# EAGLE board 2.3 (EAGLE 8.2.2)
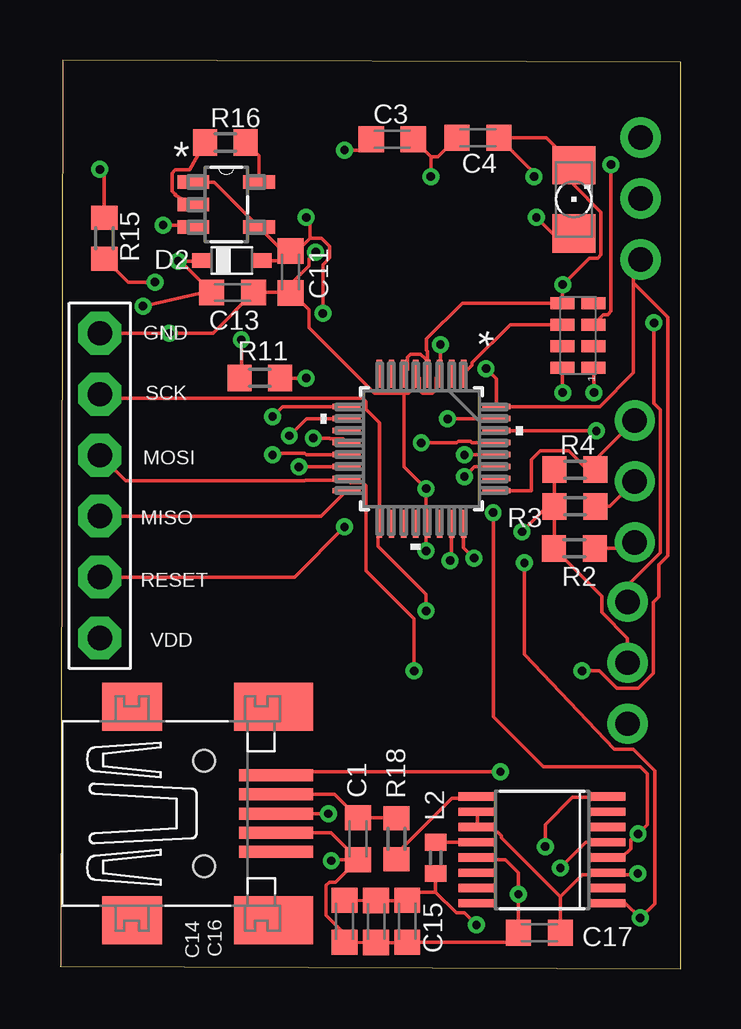
[diagram p0: board, top side]
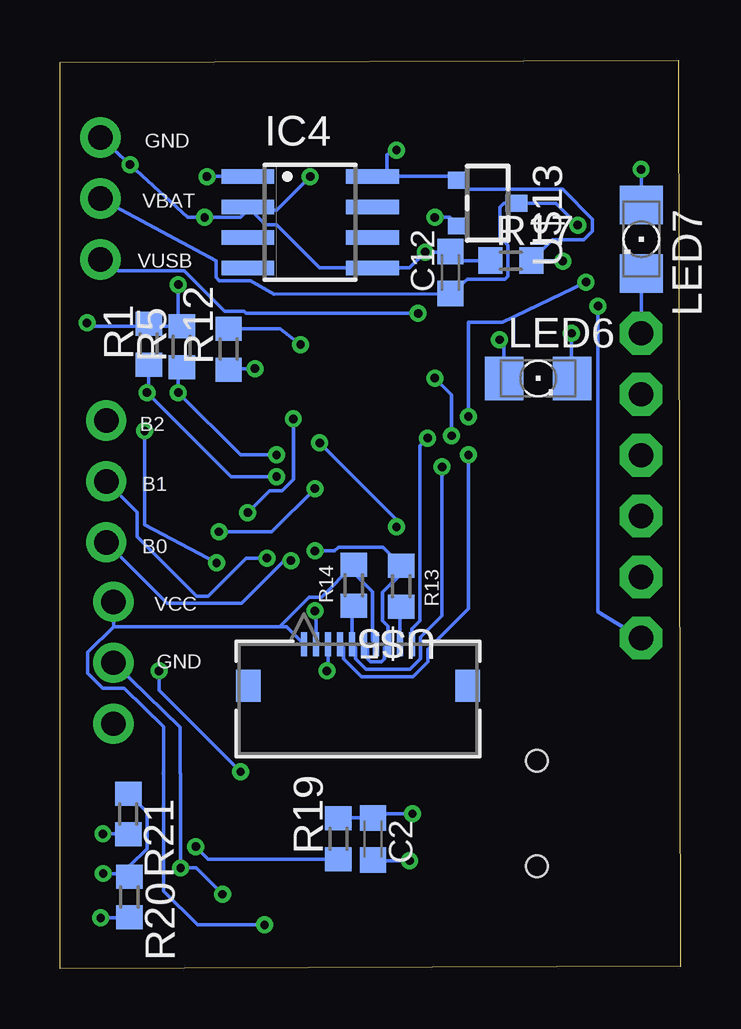
[diagram p1: board, bottom side, seen from below]

Size 25.89 x 37.86 mm. Coordinates in mm from the lower left corner, seen from the top.
Outline: 0,0.1 25.89,0 25.89,37.76 0.12,37.86 0.02,0.08
Copper layers (1*16): Top 0.0356mm / dielectric 1.5011mm / Bottom 0.0356mm
Design rules "oshpark-2layer": minimum track width 6mil, minimum drill 13mil, track to track 6mil, track to pad 6mil, pad to pad 6mil, via to via 6mil, smd to smd 6mil, copper to edge 15mil, drill to drill 6mil, minimum pad ring 7mil, minimum via ring 7mil, stop-mask expansion 2.5mil, vias tented up to drill 0mil, thermal gap 10mil

## Footprints (pad centres in the part's own frame; a part is rotated, then mirrored left to right if it is on the bottom)
C0603K = smd 1.05 x 1.08: 1 -0.875,0; 2 0.875,0
SOD323_ST = smd 0.8 x 0.6: A 1.25,0; C -1.25,0
SSOP16 = smd 0.35 x 1.55: 1 -2.223,-2.7; 2 -1.587,-2.7; 3 -0.953,-2.7; 4 -0.318,-2.7; 5 0.318,-2.7; 6 0.953,-2.7; 7 1.587,-2.7; 8 2.223,-2.7; 9 2.223,2.7; 10 1.587,2.7; 11 0.953,2.7; 12 0.318,2.7; 13 -0.318,2.7; 14 -0.953,2.7; 15 -1.587,2.7; 16 -2.223,2.7
SO08 = smd 0.6 x 2.2: 1 -1.905,-2.6; 2 -0.635,-2.6; 3 0.635,-2.6; 4 1.905,-2.6; 5 1.905,2.6; 6 0.635,2.6; 7 -0.635,2.6; 8 -1.905,2.6
1X03-CLEANBIG = drill 1.016 pad 1.676: 1 -2.54,0; 2 0,0; 3 2.54,0
1X06-BIG = drill 1.016 pad 1.778 octagon: 1 -6.35,0; 2 -3.81,0; 3 -1.27,0; 4 1.27,0; 5 3.81,0; 6 6.35,0
0402 = smd 0.7 x 0.9: 1 -0.65,0; 2 0.65,0
1206 = smd 1.6 x 1.803: A -1.422,0; C 1.422,0
R0603 = smd 1 x 1.1: 1 -0.85,0; 2 0.85,0
32A-L = smd 1.168 x 0.229: 1 -3.124,1.751; 2 -3.124,1.251; 3 -3.124,0.751; 4 -3.124,0.25; 5 -3.124,-0.25; 6 -3.124,-0.751; 7 -3.124,-1.251; 8 -3.124,-1.751; 17 3.124,-1.751; 18 3.124,-1.251; 19 3.124,-0.751; 20 3.124,-0.25; 21 3.124,0.25; 22 3.124,0.751; 23 3.124,1.251; 24 3.124,1.751 | smd 0.229 x 1.168: 9 -1.751,-3.124; 10 -1.251,-3.124; 11 -0.751,-3.124; 12 -0.25,-3.124; 13 0.25,-3.124; 14 0.751,-3.124; 15 1.251,-3.124; 16 1.751,-3.124; 25 1.751,3.124; 26 1.251,3.124; 27 0.751,3.124; 28 0.25,3.124; 29 -0.25,3.124; 30 -0.751,3.124; 31 -1.251,3.124; 32 -1.751,3.124
LCC-8 = smd 0.5 x 1: 1 0.25,0.1; 2 1.15,0.1; 3 2.05,0.1; 4 2.95,0.1; 5 2.95,1.4; 6 2.05,1.4; 7 1.15,1.4; 8 0.25,1.4
CON10_1X10_DBR_XF2L = smd 0.254 x 1.016: 1 2.25,2.286; 2 1.75,2.286; 3 1.25,2.286; 4 0.75,2.286; 5 0.25,2.286; 6 -0.25,2.286; 7 -0.75,2.286; 8 -1.25,2.286; 9 -1.75,2.286; 10 -2.25,2.286 | smd 1.016 x 1.346: 11 -4.572,4.013; 12 4.572,4.013
SOT95P270X145-5N = smd 1.321 x 0.559: 1 -1.372,0.94; 2 -1.372,0; 3 -1.372,-0.94; 4 1.372,-0.94; 5 1.372,0.94
SOT346-R = smd 0.7 x 0.9: 1 -0.95,-1.2; 2 0.95,-1.2; 3 0,1.2
32005-301 = smd 3.1 x 0.5: 1 3,1.6; 2 3,0.8; 3 3,0; 4 3,-0.8; 5 3,-1.6 | smd 2.5 x 2: M1 -3,-4.45; M2 -3,4.45 | smd 3.3 x 2: M3 2.9,4.45; M4 2.9,-4.45 | hole 0.9: 0,2.2; 0,-2.2

## Placement (x,y rotation side)
C1  47pF  [C0603K]  12.42,5.41 90 top
C2  47pF  [C0603K]  12.85,5.4 270 bottom
C3  1uF  [C0603K]  13.85,34.56 0 top
C4  2.2uF  [C0603K]  17.42,34.62 180 top
C11  1uF  [C0603K]  9.62,29.02 270 top
C12  1uF  [C0603K]  9.62,29 90 bottom
C13  1uF  [C0603K]  7.2,28.17 0 top
C14  10nF  [C0603K]  11.87,1.97 270 top
C15  4.7uF  [C0603K]  14.48,1.97 270 top
C16  100nF  [C0603K]  13.19,1.96 270 top
C17  100nF  [C0603K]  19.99,1.5 180 top
D2  BAT60J  [SOD323_ST]  7.16,29.5 0 top
IC2  FT230XS  [SSOP16]  20.1,4.95 90 top
IC4  L4931D  [SO08]  15.46,31.1 270 bottom
JP1  [1X03-CLEANBIG]  23.96,20.3 90 top
JP2  [1X06-BIG]  1.66,20.12 90 top
JP3  [1X03-CLEANBIG]  24.2,32.09 90 top
JP4  [1X03-CLEANBIG]  23.66,12.74 270 top
L2  [0402]  15.67,4.61 270 top
LED4  [1206]  21.42,32.05 90 top
LED6  [1206]  5.95,24.59 0 bottom
LED7  [1206]  1.65,30.39 270 bottom
R1  4.7K  [R0603]  22.19,26.01 90 bottom
R2  10K  [R0603]  21.44,17.51 0 top
R3  10K  [R0603]  21.47,19.26 0 top
R4  10K  [R0603]  21.47,20.79 0 top
R5  4.7K  [R0603]  20.81,25.91 90 bottom
R11  330  [R0603]  8.33,24.61 0 top
R12  10K  [R0603]  18.86,25.81 90 bottom
R13  100  [R0603]  11.66,15.93 90 bottom
R14  10K  [R0603]  13.64,15.97 270 bottom
R15  330  [R0603]  1.85,30.43 270 top
R16  2K  [R0603]  6.89,34.42 0 top
R17  10K  [R0603]  7.09,29.5 0 bottom
R18  27  [R0603]  14.03,5.41 90 top
R19  27  [R0603]  14.29,5.41 90 bottom
R20  10K  [R0603]  23,2.99 270 bottom
R21  10K  [R0603]  23.04,6.44 270 bottom
U1  ATMEGA328P-AUR32A-L  [32A-L]  15.07,21.66 270 top
U$1  M41T62LC6F  [LCC-8]  22.34,24.78 90 top
U$5  XF2L-1025-1ABOTTOM  [CON10_1X10_DBR_XF2L]  13.46,15.8 180 bottom
U$12  [SOT95P270X145-5N]  6.93,31.83 0 top
U$13  2JS305  [SOT346-R]  8.06,31.89 270 bottom
X2  MINI-USB-32005-301  [32005-301]  6.01,6.46 0 top

## Library data of the parts
C1-C4 C11-C17 = rcl
D2 = diode
IC2 = ft230x_10; MF: FTDI; MPN: FT230XS; OC_FARNELL: 2081321; OC_NEWARK: 83T7087
IC4 = v-reg-3
JP1 JP3 JP4 LED4 LED6 LED7 = adafruit
JP2 = adafruit; NAME_: value
L2 = inductors
R1-R5 R11-R17 R19-R21 = eagle-ltspice; SPICEMODEL: NONE; SPICEPREFIX: R
R18 = eagle-ltspice; SPICEMODEL: NONE; SPICEPREFIX: R6
U1 = MyParts; MANUFACTURER_PART_NUMBER: ATMEGA328PAUR; VENDOR: Atmel
U$1 U$5 = MyParts
U$12 = Microchip_By_element14_Batch_1; MPN: MCP73812T-420I/OT; OC_FARNELL: 1627187; OC_NEWARK: 27M0232; PACKAGE: SOT-5; SUPPLIER: Microchip
U$13 = SOT346-R
X2 = con-cypressindustries; OC_FARNELL: unknown; OC_NEWARK: unknown

## Nets
8: IC2.8 R19.1
9: IC2.9 R18.1
B0: JP1.1 R2.2 U1.23
B1: JP1.2 R3.2 U1.24
B2: JP1.3 R4.2 U1.25
GND: C1.1 C2.2 C3.2 C4.2 C11.2 C12.2 C13.2 C14.2 C15.2 C16.2 C17.2 IC2.5 IC2.13 IC4.2 IC4.5 JP2.6 JP3.3 JP4.2 LED4.A LED6.C LED7.C R2.1 R3.1 R4.1 R12.2 R13.2 R17.1 U1.3 U1.5 U1.21 U$1.3 U$5.6 U$5.8 X2.4
INT_RTC: U1.1 U$1.6
LCD_RESET: U1.13 U$5.4
LEDANODE: U1.12 U$5.10
MISO: JP2.3 U1.16
MOSI: JP2.4 U1.15 U$5.3
N$1: R13.1 U$5.9
N$2: IC2.12 L2.1
N$3: R15.2 U1.9
N$5: R16.2 U$12.5
N$6: R16.1 U$12.2
N$12: LED6.A R11.1
N$13: LED7.A R15.1
N$16: R11.2 U1.10
N$17: U1.18
N$26: U$5.12
N$27: U$5.11
NET1: C17.1 IC2.3 IC2.10 IC2.11 R20.1 R21.1
RESET: JP2.2 U1.29
RXD: IC2.1 R20.2 U1.30
SCK: JP2.5 U1.17 U$5.2
SCL: R5.1 U1.28 U$1.8
SDA: R1.1 U1.27 U$1.1
SHEILD: X2.5
SS: R14.2 U1.14 U$5.5
TXD: IC2.4 R21.2 U1.31
USB+: C2.1 R19.2 X2.3
USB-: C1.2 R18.2 X2.2
VBAT: C12.1 JP3.2 U$12.3 U$13.3
VCC: C4.1 C14.1 C15.1 C16.1 IC4.1 JP4.1 L2.2 LED4.C R1.2 R5.2 R14.1 U1.4 U1.6 U$1.5 U$5.1 U$5.7
VDD: C3.1 C13.1 D2.C IC4.8 JP2.1 R17.2 U$13.1
VUSB: C11.1 D2.A JP3.1 R12.1 U1.32 U$12.1 U$12.4 U$13.2 X2.1

## Tracks (layer width: path | path; a pad name or v marks a point on that pad's centre or on a via)
8  (via drill 0.35)
  Top 0.152: v20.23,5.08 20.23,6 21.37,7.14 22.77,7.14 IC2.8
  Bottom 0.152: R19.1 19.71,4.56 v20.23,5.08
9
  Top 0.152: R18.1 14.03,4.78 16.34,7.09 17.32,7.09 IC2.9
B0  (via drill 0.35)
  Top 0.152: R2.2 23.71,17.51 JP1.1 | v16.26,17 16.32,17.06 U1.23
  Bottom 0.152: JP1.1 21.42,15.21 18.33,15.21 16.54,17 v16.26,17
B1  (via drill 0.35)
  Top 0.152: R3.2 22.92,19.26 JP1.2 | v17.26,17.1 16.82,17.54 U1.24
  Bottom 0.152: JP1.2 22.67,19 22.67,17.98 20.2,15.52 19.72,15.52 18.14,17.1 v17.26,17.1
B2
  Top 0.152: JP1.3 22.32,21.2 R4.2 22,20.79 21.22,21.57 20.03,21.57 19.67,21.21 19.67,19.91 U1.25
GND  (via drill 0.35)
  Top 0.152: C13.2 9.47,28.17 C11.2 9.62,28.21 | C13.2 | v10.66,29.86 10.39,29.58 10.39,29.27 9.62,28.51 9.62,28.21 | C1.1 11.3,5.66 X2.4 | v11.31,4.49 11.31,4.54 C1.1 | C1.1 11.48,3.6 11.23,3.6 11.1,3.46 11.1,2.22 11.87,1.45 C14.2 C16.2 14.4,1.08 C15.2 14.42,1.09 18.72,1.1 C17.2 v19.12,3.1 19.12,3.99 18.56,4.54 17.49,4.54 IC2.13 | IC2.5 21.94,5.26 v20.86,4.19 | R4.1 R3.1 | R3.1 20.62,17.54 R2.1 22.6,15.51 22.6,14.84 23.66,13.77 JP4.2 | 15.46,33.83 C3.2 | 15.46,33.83 v15.46,33 | C4.2 15.75,33.83 15.46,33.83 | JP2.6 v4.56,26.47 6.38,26.47 C13.2 | R3.1 20.32,19.26 v19.26,18.2 | 15.26,18.6 v15.26,20 14.35,20.91 14.35,23.97 | 15.26,18.6 U1.21 | LED4.A 20.54,30.63 v19.86,31.3 | v15.26,17.4 15.26,18.6 | v15.86,26 15.86,24.82 U1.3 15.67,24.63 15.67,24.11 15.53,23.97 15.11,23.97 14.98,24.11 14.98,24.63 U1.5 14.79,24.75 14.79,24.22 14.53,23.97 14.35,23.97 | 14.35,23.97 13.11,23.97 10.38,26.7 10.38,27.44 9.62,28.21 | U$1.3 22.66,27.25 22.84,27.25 22.97,27.38 v22.97,33.5
  Bottom 0.152: R17.1 9.12,29.5 C12.2 9.64,29.86 v10.66,29.86 11.32,29.2 IC4.5 15.07,29.2 16.87,30.99 17.32,30.99 17.92,31.59 | C2.2 12.85,4.49 v11.31,4.49 | v19.12,3.1 20.21,4.19 v20.86,4.19 20.86,8.12 20.88,8.14 20.88,10.06 JP4.2 | 17.99,31.66 17.92,31.59 | 17.99,31.66 IC4.2 | v15.46,33 16.87,31.59 17.92,31.59 | U$5.6 13.07,13.37 13.07,12.91 12.94,12.78 12.49,12.78 12.36,12.91 12.36,13.37 U$5.8 12.21,14.26 12.44,14.48 12.44,15.67 11.66,16.45 R13.2 12.43,17.55 14.29,17.55 14.44,17.4 v15.26,17.4 | v19.26,18.2 17.06,18.2 v15.26,20 | 17.99,31.66 18.35,31.3 v19.86,31.3 20.58,31.3 v22.97,33.5 JP3.3 | v15.86,26 16.72,26.66 R12.2 | LED6.C 4.56,24.62 v4.56,26.47 | LED7.C JP2.6
INT_RTC
  Top 0.152: U1.1 17.18,25.14 17.18,25.24 18.77,26.83 U$1.6
LCD_RESET  (via drill 0.35)
  Top 0.152: U1.13 10.28,21.41 10.2,21.48 8.94,21.48 v8.86,21.4
  Bottom 0.152: U$5.4 14.07,13.37 14.07,12.91 13.33,12.17 11.17,12.17 10.55,12.79 10.55,13.31 8.86,15 v8.86,21.4
LEDANODE  (via drill 0.35)
  Top 0.152: v10.56,22.1 11.24,22.1 11.27,22.07 11.79,22.07 U1.12
  Bottom 0.152: U$5.10 11.21,14.16 10.88,14.48 10.88,21.78 v10.56,22.1
MISO
  Top 0.152: U1.16 10.89,18.85 JP2.3
MOSI  (via drill 0.35)
  Top 0.152: 12.01,20.35 12.11,20.25 12.63,20.25 12.76,20.12 12.76,16.58 14.76,14.58 v14.76,12.4 | 12.01,20.35 U1.15 | 12.01,20.35 10.24,20.35 10.2,20.32 2.73,20.32 JP2.4
  Bottom 0.152: U$5.3 14.71,12.45 v14.76,12.4
N$1
  Bottom 0.152: R13.1 11.71,15.03 U$5.9
N$2
  Top 0.152: L2.1 IC2.12
N$3  (via drill 0.35)
  Top 0.152: R15.2 2.83,28.6 v3.96,28.6 | v8.86,23 9.27,23.41 U1.9
  Bottom 0.152: v3.96,28.6 7.44,26.92 8.87,26.92 8.86,25.13 v8.86,23
N$5
  Top 0.152: R16.2 8.31,33.86 U$12.5
N$6
  Top 0.152: R16.1 5.4,33.28 4.81,33.28 4.67,33.14 4.67,32.4 4.81,32.26 4.82,32.26 4.8,32.23 U$12.2
N$12  (via drill 0.35)
  Top 0.152: R11.1 7.56,24.69 v7.56,26.2
  Bottom 0.152: v7.56,26.2 7.38,26.01 LED6.A
N$13  (via drill 0.35)
  Top 0.152: v1.66,33.3 1.85,33.11 R15.1
  Bottom 0.152: LED7.A 1.66,31.82 v1.66,33.3
N$16  (via drill 0.35)
  Top 0.152: R11.2 v10.26,24.6 | v9.56,22.2 10.27,22.91 U1.10
  Bottom 0.152: v10.26,24.6 9.56,23.9 v9.56,22.2
NET1  (via drill 0.35)
  Top 0.152: 20.87,2.99 C17.1 | 20.87,2.99 21.78,3.91 22.72,3.91 | 22.72,3.91 IC2.3 | IC2.10 IC2.11 18.04,5.9 18.4,5.53 18.4,5.46 20.87,2.99 | v24.09,3.96 24.04,3.91 22.72,3.91
  Bottom 0.152: v24.09,3.96 23.12,3.96 R20.1 23,4.26 22.27,4.99 22.27,6.51 R21.1
RESET  (via drill 0.35)
  Top 0.152: JP2.2 9.77,16.31 v11.86,18.4 | v15.06,21.9 16.54,21.9 16.62,21.98 17.1,21.98 17.18,21.91 U1.29
  Bottom 0.152: v11.86,18.4 11.86,18.7 v15.06,21.9
RXD  (via drill 0.35)
  Top 0.152: IC2.1 23.58,2.72 v24.19,2.11 24.79,2.71 24.79,8.24 23.9,9.13 23.12,9.13 19.36,13.09 v19.36,16.9 | v22.36,22.4 v22.35,22.41 U1.30
  Bottom 0.152: R20.2 23.03,2.11 v24.19,2.11 | v19.36,16.9 22.36,18.5 v22.36,22.4
SCK  (via drill 0.35)
  Top 0.152: v15.26,14.9 15.26,15.6 13.26,17.6 13.26,18.48 U1.17 13.32,22.74 13.3,22.76 13.01,23.05 12.76,23.3 12.76,23.62 12.63,23.75 1.83,23.75 JP2.5
  Bottom 0.152: U$5.2 15.21,14.85 v15.26,14.9
SCL  (via drill 0.35)
  Top 0.152: U$1.8 20.94,24.12 v20.96,24 | v16.86,21.4 v16.87,21.41 U1.28
  Bottom 0.152: R5.1 20.96,24.91 v20.96,24 18.36,21.4 v16.86,21.4
SDA  (via drill 0.35)
  Top 0.152: v22.26,24 22.26,25.01 U$1.1 | v16.86,20.5 17.27,20.91 U1.27
  Bottom 0.152: R1.1 22.19,24.07 v22.26,24 18.76,20.5 v16.86,20.5
SS  (via drill 0.35)
  Top 0.152: v9.96,20.9 v9.97,20.91 U1.14
  Bottom 0.152: R14.2 13.71,15.05 U$5.5 13.57,13.37 13.57,12.91 13.13,12.47 11.3,12.47 10.86,12.91 10.86,13.81 9.96,14.7 v9.96,20.9
TXD  (via drill 0.35)
  Top 0.152: IC2.4 23.44,4.63 23.8,4.99 23.8,5.36 v24.1,5.61 24.49,6 24.49,8.11 24.2,8.4 20.16,8.4 18.06,10.5 v18.06,19 | v16.16,22.9 16.17,22.91 U1.31
  Bottom 0.152: R21.2 23.07,5.61 v24.1,5.61 | v18.06,19 17.14,19.92 16.62,19.92 16.16,20.38 v16.16,22.9
USB+  (via drill 0.35)
  Top 0.152: v11.19,6.45 v11.19,6.46 X2.3
  Bottom 0.152: v11.19,6.45 12.85,6.45 C2.1 14.29,6.28 R19.2
USB-
  Top 0.152: X2.2 11.45,7.26 C1.2 14.01,6.29 R18.2
VBAT  (via drill 0.35)
  Top 0.152: U$12.3 5.47,30.98 v4.3,30.98
  Bottom 0.152: v4.3,30.98 5.21,31.89 U$13.3 7.39,31.89 7.55,31.73 7.55,30.48 7.21,30.14 7.21,28.86 7.35,28.72 8.9,28.72 C12.1 16.96,28.1 17.95,28.67 19.26,28.67 19.39,28.8 19.39,29.5 JP3.2
VCC  (via drill 0.35)
  Top 0.152: C14.1 C16.1 14.4,2.83 C15.1 14.74,3.17 15.67,3.18 | v17.36,1.82 16.86,2.32 16.53,2.32 15.67,3.18 | 15.67,3.18 L2.2 | v19.76,33 19.76,33.16 C4.1 20.28,34.62 LED4.C 21.42,32.65 22.55,31.52 22.55,29.73 22.42,29.6 22.06,29.6 v20.96,28.5 20.94,28.48 U$1.5 16.77,27.73 15.28,26.24 15.28,25.76 15.32,25.72 15.32,25.4 | U1.4 15.32,25.4 | U1.6 14.48,24.94 14.48,25.46 14.61,25.6 15.03,25.6 15.23,25.4 15.32,25.4 | JP4.1 23.66,15.95 25.03,17.32 25.03,23.28 24.76,23.55 v24.76,26.9
  Bottom 0.152: v17.36,1.82 20.16,1.82 21.57,3.23 21.57,8.1 | 21.57,8.1 21.57,8.13 21.58,8.14 | 20.94,26.76 R5.2 | 22.09,26.76 20.94,26.76 | 22.09,26.76 R1.2 | v20.96,28.5 20.96,26.78 20.94,26.76 | 21.57,8.1 21.57,10.08 23.22,11.67 24.11,11.67 24.73,12.3 24.73,13.18 23.66,14.25 | JP4.1 23.66,14.25 | v19.76,33 v19.76,33.01 IC4.1 | U$5.7 12.86,13.66 12.86,15.71 13.64,16.49 R14.1 14.98,15.48 15.5,15.48 16.74,14.25 16.95,14.25 | 16.95,14.25 23.66,14.25 | 16.95,14.25 16.45,14.25 U$5.1 | v24.76,26.9 24.76,26.76 22.09,26.76
VDD  (via drill 0.35)
  Top 0.152: D2.C 5.89,29.48 v4.93,29.48 5.05,29.45 C13.1 6.03,28.17 v3.46,27.6 | C3.1 12.52,34.1 v11.86,34.1
  Bottom 0.152: v4.93,29.48 5.07,29.5 6.21,29.5 | 6.21,29.5 R17.2 5.37,30.37 4.05,30.37 3.7,30.73 3.7,31.23 4.93,32.47 8.89,32.47 U$13.1 9.43,33.01 12.26,33.01 | 6.21,29.79 6.21,29.5 | 12.26,33.01 IC4.8 | v11.86,34.1 12.26,33.9 12.26,33.01 | v3.46,27.6 3.46,14.88 JP2.1
VUSB  (via drill 0.35)
  Top 0.152: U$12.1 6.43,32.77 U$12.4 9.36,29.84 9.54,29.84 | 9.54,29.84 9.1,29.5 D2.A | 9.54,29.84 C11.1 9.88,29.89 10.42,30.44 | JP3.1 23.9,29.39 23.9,28.58 | 23.9,28.58 23.9,24.82 22.5,23.42 U1.32 18.2,24.57 v17.76,25 | 10.42,30.44 10.9,30.44 11.25,30.1 11.25,29.61 10.96,29.33 v10.96,27.3 | X2.1 9.15,8.2 v18.36,8.2 | v21.76,12.4 22.49,12.4 23.22,11.67 24.11,11.67 24.73,12.3 24.73,15.27 24.96,15.5 24.96,16.82 25.34,17.2 25.34,27.14 23.9,28.58 | v10.26,31.3 10.42,31.14 10.42,30.44
  Bottom 0.152: R12.1 18.82,25 v17.76,25 | v10.96,27.3 18.13,27.3 18.22,27.39 19.03,27.39 20.72,29.08 23.44,29.08 JP3.1 | v18.36,8.2 21.76,11.6 v21.76,12.4 | U$13.2 9.62,31.3 v10.26,31.3

## Text on the board
tSilk: GND | SCK | MOSI | MISO | RESET | VDD
bSilk: GND | VBAT | VUSB | B2 | B1 | B0 | VCC | GND